# EAGLE board iRisSchematic_r (EAGLE 7.5.0)
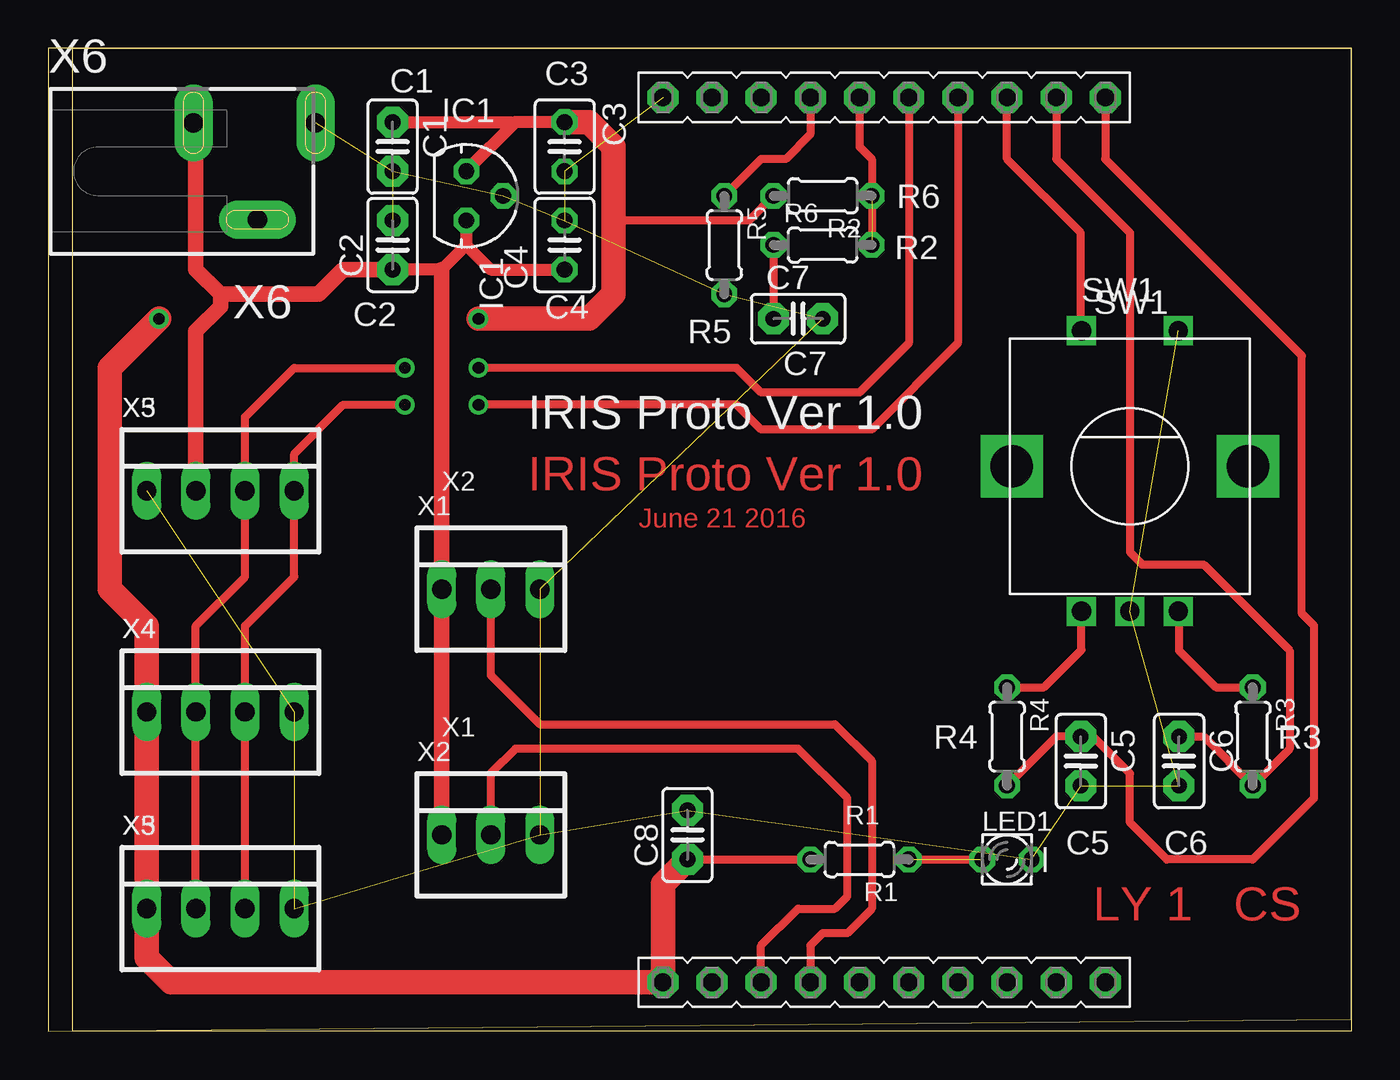
[diagram p0: board, top side]
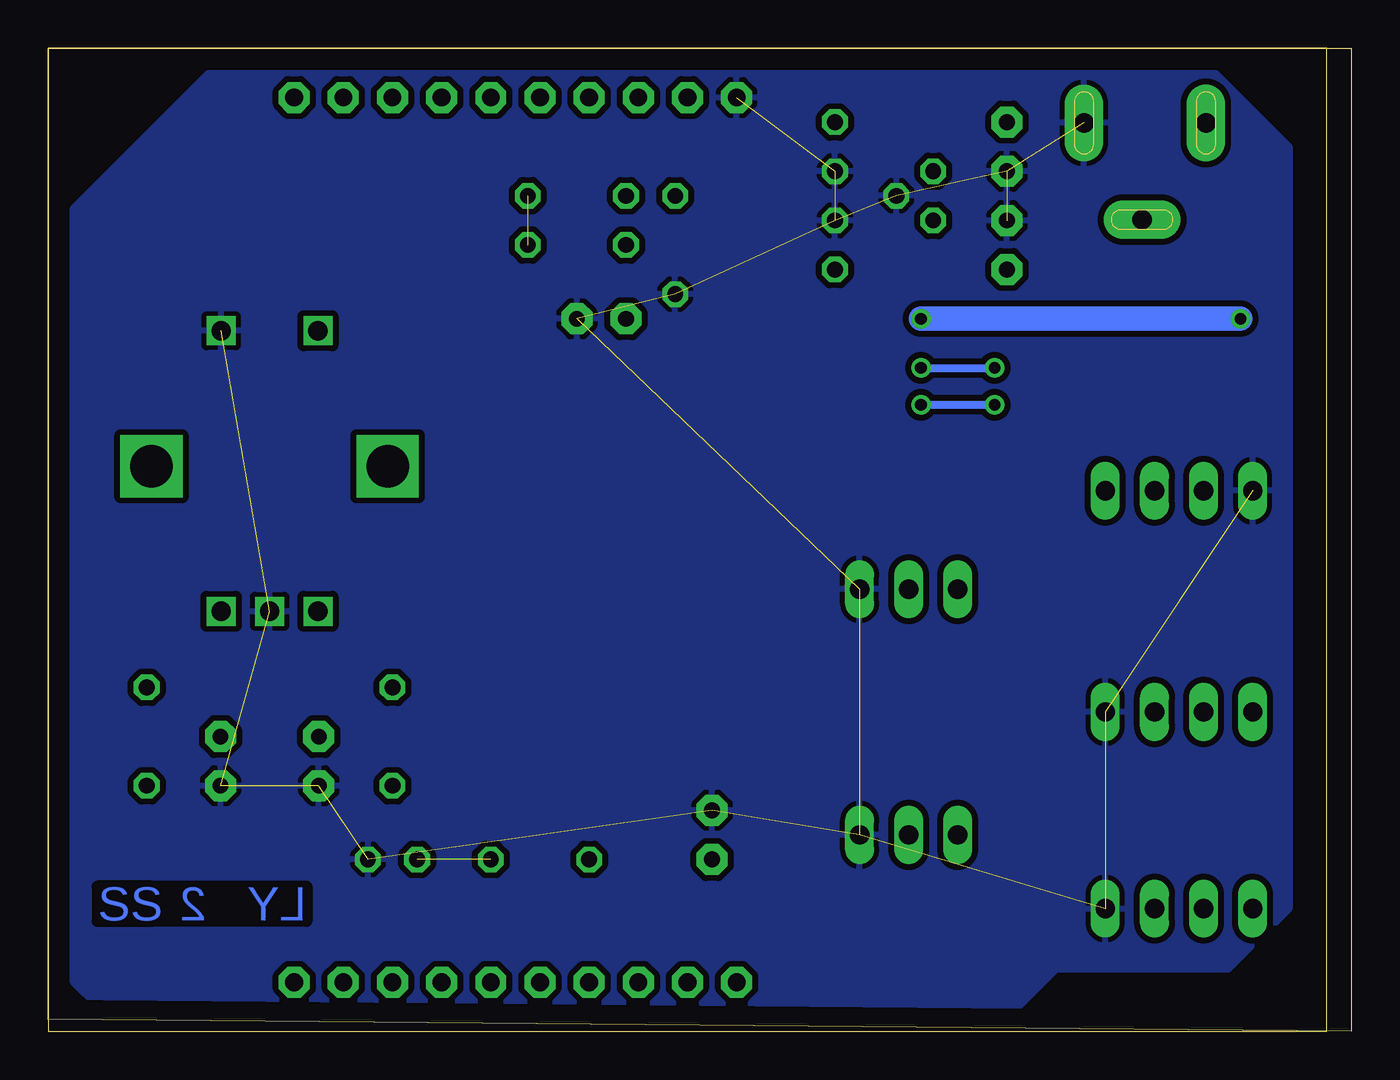
[diagram p1: board, bottom side, seen from below]

Size 67.31 x 50.8 mm. Coordinates in mm from the lower left corner, seen from the top.
Outline: 0,50.8 0,0 67.31,0.63 67.31,50.8 0,50.8
Copper layers (1*16): Top 0.035mm / dielectric 1.5mm / Bottom 0.035mm
Design rules "iRisSchematic *": minimum track width 10mil, minimum drill 20mil, track to track 12mil, track to pad 12mil, pad to pad 12mil, via to via 12mil, smd to smd 8mil, copper to edge 40mil, drill to drill 8mil, minimum pad ring 10mil, minimum via ring 8mil, stop-mask expansion 4mil, vias tented up to drill 0mil, thermal gap 10mil

## Footprints (pad centres in the part's own frame; a part is rotated, then mirrored left to right if it is on the bottom)
C2.5-2 = drill 0.813 pad 1.6 octagon: 1 -1.27,0; 2 1.27,0
C025-030X050 = drill 0.813 octagon: 1 -1.27,0; 2 1.27,0
78LXX = drill 0.813 octagon: GND 0,1.905; IN 1.27,0; OUT -1.27,0
LED_LD260 = drill 0.813 octagon: A -1.27,0; K 1.27,0
0204/5 = drill 0.813 octagon: 1 -2.54,0; 2 2.54,0
ALPS_EC12E_SW = drill 1 square: A -2.5,-7.5; B 2.5,-7.5; C 0,-7.5; D -2.5,7; E 2.5,7 | drill 2.2 square: GND1 -6.1,0; GND2 6.1,0
LAUNCHPAD = drill 0.914 pad 1.6 octagon: GND 30.48,48.26; P1.0 33.02,2.54; P1.1 35.56,2.54; P1.2 38.1,2.54; P1.3 40.64,2.54; P1.4 43.18,2.54; P1.5 45.72,2.54; P1.6 45.72,48.26; P1.7 43.18,48.26; P2.0 48.26,2.54; P2.1 50.8,2.54; P2.2 53.34,2.54; P2.3 53.34,48.26; P2.4 50.8,48.26; P2.5 48.26,48.26; P2.6 33.02,48.26; P2.7 35.56,48.26; RST 40.64,48.26; TEST 38.1,48.26; VCC 30.48,2.54
22-23-2031 = drill 1 long: 1 -2.54,0; 2 0,0; 3 2.54,0
22-23-2041 = drill 1 long: 1 -3.81,0; 2 -1.27,0; 3 1.27,0; 4 3.81,0
SCD-014-A = drill 1 pad 2 long: 1 -2.5,13.8; 2 -2.5,7.5; 3 2.5,10.8

## Placement (x,y rotation side)
C1  .1uF  [C2.5-2]  17.78,45.72 270 top
C2  .1 uF  [C2.5-2]  17.78,40.64 90 top
C3  47uF  [C025-030X050]  26.67,45.72 270 top
C4  10uF  [C025-030X050]  26.67,40.64 90 top
C5  .01uF  [C2.5-2]  53.34,13.97 270 top
C6  .01uF  [C2.5-2]  58.42,13.97 270 top
C7  .01uF  [C2.5-2]  38.73,36.83 0 top
C8  .01uF  [C2.5-2]  33.02,10.16 90 top
IC1  78L03  [78LXX]  21.59,43.18 270 top
LED1  Red  [LED_LD260]  49.53,8.89 0 top
R1  330  [0204/5]  41.91,8.89 180 top
R2  100k  [0204/5]  40.01,43.18 180 top
R3  47  [0204/5]  62.23,15.24 270 top
R4  47  [0204/5]  49.53,15.24 270 top
R5  100k  [0204/5]  34.92,40.64 270 top
R6  1k  [0204/5]  40.01,40.64 0 top
SW1  EC12E_SW  [ALPS_EC12E_SW]  55.88,29.21 0 top
U$1  LAUNCHPAD  [LAUNCHPAD]  1.27,0 0 top
X1  22-23-2031  [22-23-2031]  22.86,22.86 0 top
X2  22-23-2031  [22-23-2031]  22.86,10.16 0 top
X3  22-23-2041  [22-23-2041]  8.89,27.94 0 top
X4  22-23-2041  [22-23-2041]  8.89,16.51 0 top
X5  22-23-2041  [22-23-2041]  8.89,6.35 0 top
X6  Jack  [SCD-014-A]  0,44.45 270 top

## Library data of the parts
C1 C2 C5-C8 = capacitor-wima
C3 C4 R1-R6 = rcl
IC1 = v-reg
LED1 = eagle-ltspice; SPICEMODEL: NONE; SPICEPREFIX: D; SPICETYPE: diode
SW1 = switch-alps; MPN: EC12E2424407; OC_FARNELL: 1520813; OC_NEWARK: 74M1068
U$1 = TI_launchpad
X1 X2 = con-molex; MF: MOLEX; MPN: 22-23-2031; OC_FARNELL: 1462950; OC_NEWARK: 30C0862
X3-X5 = con-molex; MF: MOLEX; MPN: 22-23-2041; OC_FARNELL: 1462920; OC_NEWARK: 38C0355
X6 = con-shiua-chyuan; OC_FARNELL: unknown; OC_NEWARK: unknown

## Nets
GND: C1.2 C2.2 C3.2 C4.2 C5.2 C6.2 C7.2 C8.2 IC1.GND LED1.K R5.2 SW1.C SW1.E U$1.GND X1.3 X2.3 X3.1 X4.4 X5.4 X6.1
N$1: LED1.A R1.1
N$2: SW1.D U$1.P2.5
N$3: C5.1 R4.2 U$1.P2.3
N$5: C6.1 R3.2 U$1.P2.4
N$7: U$1.P1.1 X2.2
N$8: R5.1 U$1.TEST
N$9: U$1.P1.6 X3.4 X4.3 X5.3
N$10: R2.1 R6.2 U$1.RST
N$14: C1.1 C3.1 C8.1 IC1.OUT R1.2 R2.2 U$1.VCC X4.1 X5.1
N$17: R3.1 SW1.B
N$18: R4.1 SW1.A
N$20: C7.1 R6.1
N$21: C2.1 C4.1 IC1.IN X1.1 X2.1 X3.2 X6.2
N$22: U$1.P1.2 X1.2
N$27: U$1.P1.7 X3.3 X4.2 X5.2

## Tracks (layer width: path | path; a pad name or v marks a point on that pad's centre or on a via)
GND  (19 unrouted)
  pour Bottom: 3.18,45.72 3.18,6.35 6.35,3.18 15.24,3.18 17.15,1.27 64.77,1.27 66.04,2.54 66.04,42.55 59.06,49.53 6.98,49.53
N$1  (1 unrouted)
  Top 0.406: R1.1 LED1.A
N$2
  Top 0.406: SW1.D 53.34,36.25 53.34,41.27 49.53,45.09 U$1.P2.5
N$3
  Top 0.406: R4.2 52.07,15.24 C5.1 53.97,15.24 55.88,13.34 55.88,10.8 57.78,8.89 62.23,8.89 65.41,12.07 65.41,20.95 64.77,21.59 64.77,34.92 54.61,45.09 U$1.P2.3
N$5
  Top 0.406: C6.1 59.69,15.24 R3.2 64.14,14.61 64.14,19.68 59.69,24.13 56.52,24.13 55.88,24.77 55.88,41.27 52.07,45.09 U$1.P2.4
N$7
  Top 0.406: U$1.P1.1 36.83,4.45 38.73,6.35 40.64,6.35 41.28,6.98 41.28,12.07 38.73,14.61 24.13,14.61 22.86,13.34 X2.2
N$8
  Top 0.406: U$1.TEST 39.37,46.35 38.1,45.09 36.83,45.09 R5.1
N$9  (via drill 0.6)  (1 unrouted)
  Top 0.406: X5.3 X4.3 10.16,20.95 12.7,23.49 X3.4 12.7,29.84 15.24,32.38 v18.41,32.38 | U$1.P1.6 46.99,35.56 42.55,31.12 36.83,31.12 35.56,32.38 | 35.56,32.38 v22.23,32.38 35.56,32.38
  Bottom 0.406: v22.23,32.38 v18.41,32.38
N$10  (1 unrouted)
  Top 0.406: U$1.RST 41.91,45.72 42.55,45.09 R6.2
N$14  (via drill 0.6)
  Top 0.406: C8.1 R1.2 | R2.2 36.2,41.91 29.21,41.91
  Top 0.61: C1.1 24.13,46.99 | C3.1 24.13,46.99 | 24.13,46.99 IC1.OUT
  Top 1.27: C8.1 31.75,7.62 U$1.VCC 6.35,2.54 5.08,3.81 X5.1 X4.1 5.08,20.95 3.18,22.86 3.18,34.29 v5.71,36.83 | C3.1 27.94,46.99 29.21,45.72 29.21,41.91 29.21,38.1 27.94,36.83 v22.23,36.83
  Bottom 1.27: v22.23,36.83 v5.71,36.83
N$17
  Top 0.406: 62.23,17.86 R3.1 60.33,17.78 58.42,19.68 58.42,21.67 SW1.B
N$18
  Top 0.406: R4.1 51.44,17.78 53.38,19.73 SW1.A
N$20
  Top 0.406: R6.1 C7.1
N$21
  Top 0.61: IC1.IN 21.59,40.64 | 21.59,40.64 20.32,39.37 C2.1 | 21.59,40.64 22.86,39.37 C4.1
  Top 0.813: X6.2 7.62,46.83 7.62,39.37 8.89,38.1 | 8.89,38.1 13.97,38.1 15.24,39.37 C2.1 | X3.2 7.62,36.2 8.89,37.47 8.89,38.1 | 20.32,39.37 X1.1 X2.1
N$22
  Top 0.406: X1.2 22.86,18.41 25.4,15.88 40.64,15.88 42.55,13.97 42.55,6.35 41.28,5.08 40.01,5.08 39.37,4.45 U$1.P1.2
N$27  (via drill 0.6)  (1 unrouted)
  Top 0.406: X5.2 X4.2 7.62,20.95 10.16,23.49 X3.3 10.16,31.75 12.7,34.29 v18.41,34.29 | U$1.P1.7 44.45,35.56 41.91,33.02 36.83,33.02 35.56,34.29 v22.23,34.29
  Bottom 0.406: v22.23,34.29 v18.41,34.29

## Text on the board
Top: IRIS Proto Ver 1.0 | June 21 2016 | LY 1 CS
Bottom: LY 2 | SS
_tNames: C1 | C3 | IC1 | R6 | R2 | SW1 | X6 | C2 | C4 | R5 | C7 | X5 | IRIS Proto Ver 1.0 | X2 | X4 | X1 | R4 | R3 | X3 | R1 | LED1 | C5 | C6